# EAGLE board MAIN_CNTRL_v02 (EAGLE 9.7.0), part 1 of 2
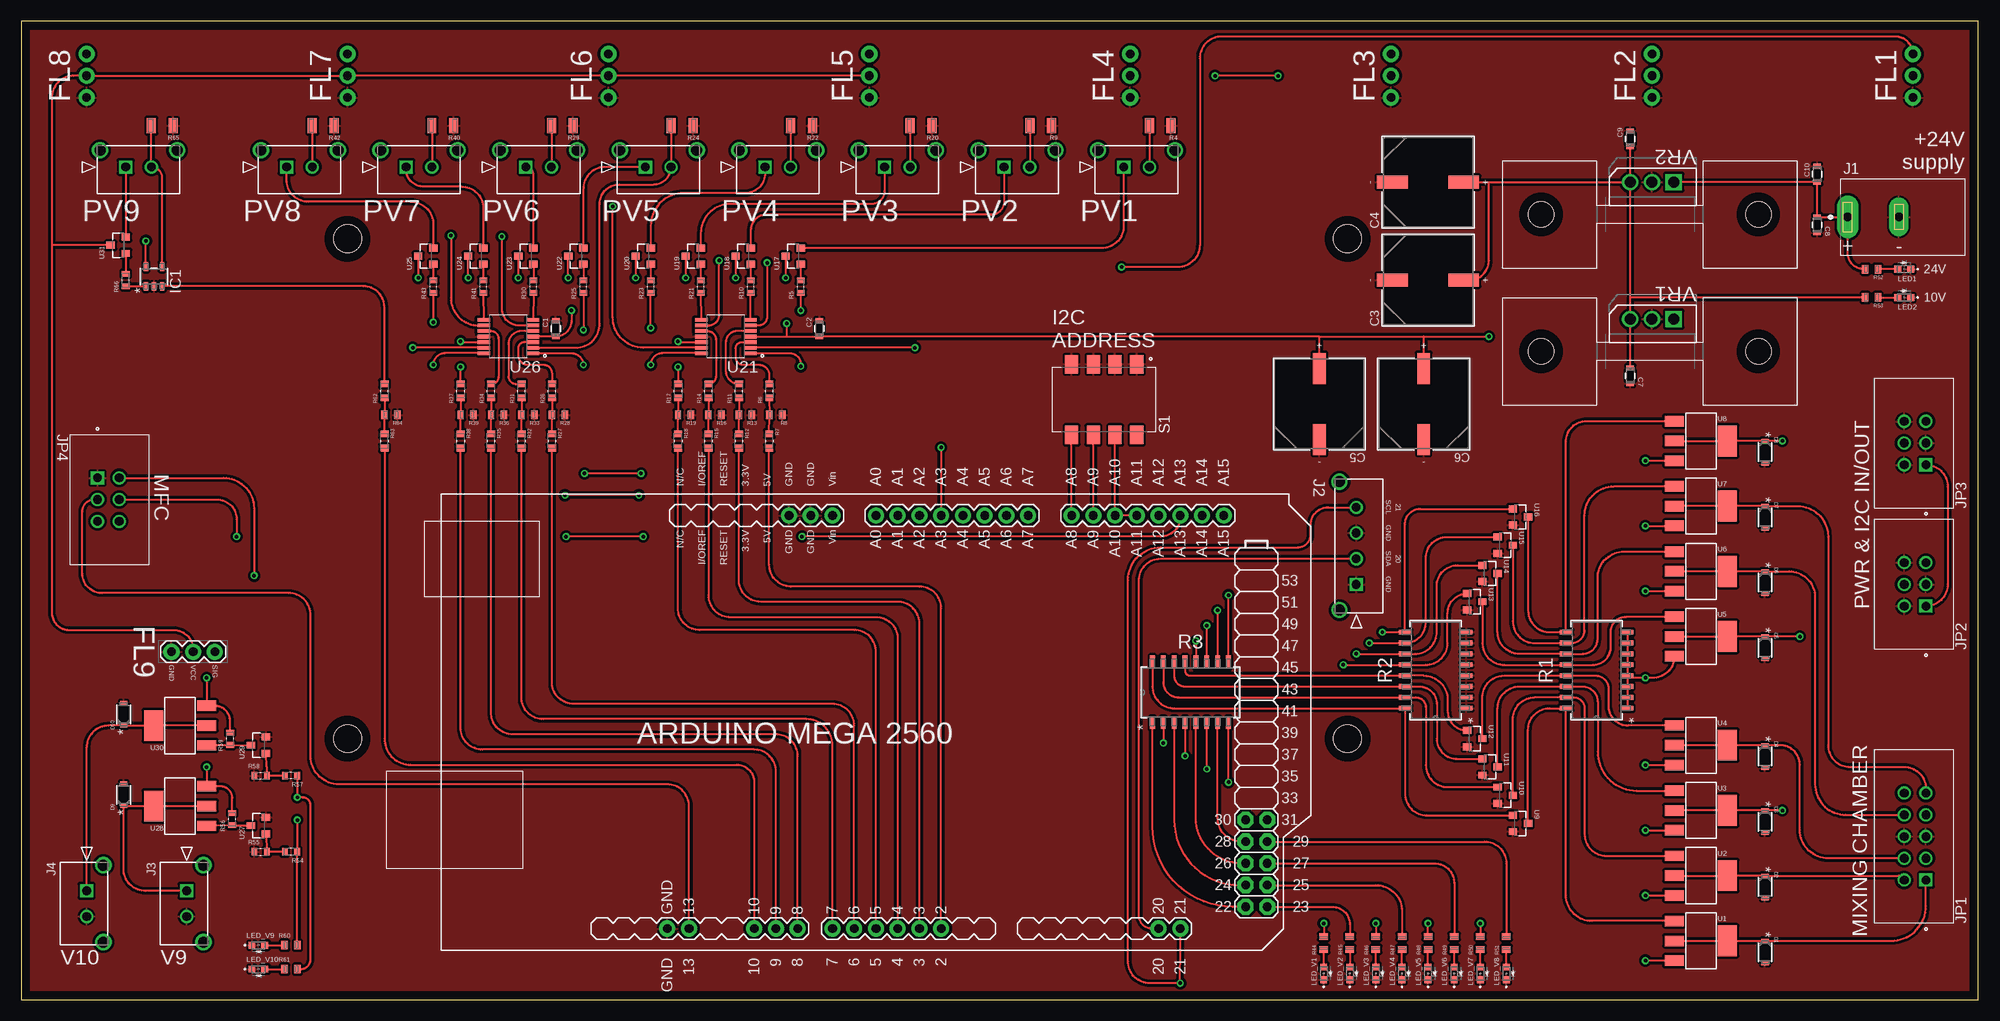
[diagram p0: board, top side]
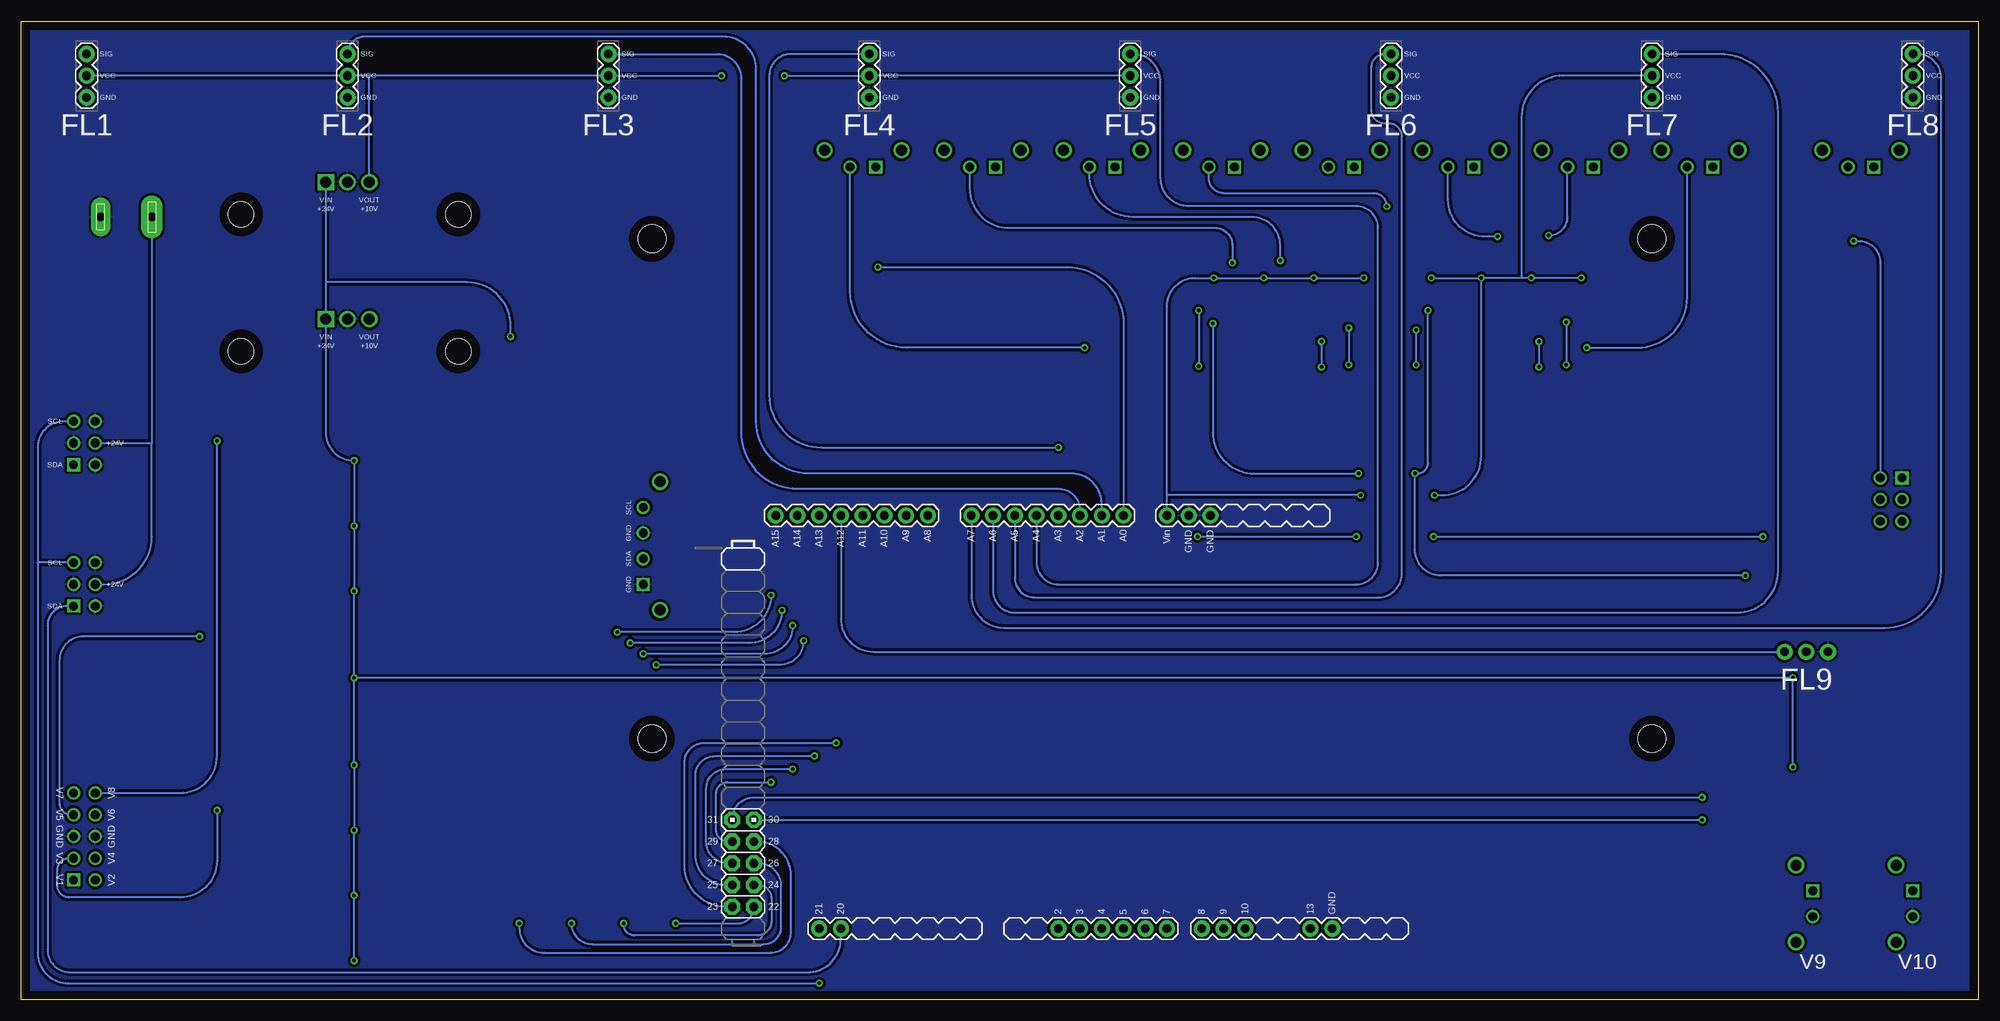
[diagram p1: board, bottom side, seen from below]

Size 228.6 x 114.3 mm. Coordinates in mm from the lower left corner, seen from the top.
Outline: 0,114.3 0,0 228.6,0 228.6,114.3 0,114.3
Copper layers (1*16): Top 0.035mm / dielectric 1.5mm / Bottom 0.035mm
Design rules "default": minimum track width 6mil, minimum drill 0.35mm, track to track 6mil, track to pad 6mil, pad to pad 6mil, via to via 6mil, smd to smd 6mil, copper to edge 40mil, drill to drill 6mil, minimum pad ring 10mil, minimum via ring 8mil, stop-mask expansion 4mil, vias tented up to drill 0mil, thermal gap 10mil
Net classes: 0 default: width 0.203 mm, drill 0.406 mm, clearance 0.203 mm; 1 power: width 0.61 mm, drill 0.406 mm, clearance 0.203 mm; 2 gnd: width 0.305 mm, drill 0.406 mm, clearance 0.203 mm; 3 power usb: width 0.508 mm, drill 0.406 mm, clearance 0.203 mm
Holes 3.28 mm at 154.94,88.9 154.94,30.48 38.1,30.48 38.1,88.9

## Footprints (pad centres in the part's own frame; a part is rotated, then mirrored left to right if it is on the bottom)
CAP_1608_TDK = smd 0.559 x 0.889: 1 -0.927,0; 2 0.927,0
CAP_J-V_10X10P5_RUB = smd 3.607 x 1.499: + 4.153,0; - -4.153,0
DIO_RB160VAM_ROM = smd 0.457 x 0.838: 1 -1.321,0; 2 1.321,0
1X03_FL = drill 1.016 pad 1.88: 1 0,0; 2 2.54,0; 3 5.08,0
V8813X = hole 3: -12.7,0; 12.7,0
SOT23-5L_STM-L = smd 1.016 x 0.508: 1 -1.143,0.95; 2 -1.143,0; 3 -1.143,-0.95; 4 1.143,-0.95; 5 1.143,0.95
CUI_PJ-037AH = drill 1 pad 2.5 long: 1 0,0 | drill 1 pad 2.25 long: 2 6,0
MOLEX_4P_FOOTPRINT = drill 1.02 pad 1.52 square: 1 0,0 | drill 1.02 pad 1.52: 2 -3,0; 3 -6,0; 4 -9,0 | drill 1.27 pad 1.27: M1 3,-1.96; M2 -12,-1.96
MOLEX_2P_FOOTPRINT = drill 1.02 pad 1.52 square: 1 0,0 | drill 1.02 pad 1.52: 2 -3,0 | drill 1.27 pad 1.27: M1 3,-1.96; M2 -6,-1.96
CONN_10P_TE_1761681-3_SE_FOR_V02 = drill 1.02 pad 1.37: GND 5.08,0; GND. 5.08,2.54; V2 0,2.54; V3 2.54,0; V4 2.54,2.54; V5 7.62,0; V6 7.62,2.54; V7 10.16,0; V8 10.16,2.54 | drill 1.02 pad 1.37 square: V1 0,0
CONN_6P_TE_1761681-1 = drill 1.02 pad 1.37 square: 1 0,0 | drill 1.02 pad 1.37: 2 0,2.54; 3 2.54,0; 4 2.54,2.54; 5 5.08,0; 6 5.08,2.54
LED_VISHAY_VLMX13XX = smd 0.8 x 0.8: A 0.75,0; C -0.75,0
MOLEX_2P_PVALVES = drill 1.02 pad 1.52 square: 1 0,0 | drill 1.02 pad 1.52: 2 -3,0 | drill 1.27 pad 1.27: M1 3,-1.96; M2 -6,-1.96
BO_4816P = smd 1.422 x 0.559: 1 -3.581,4.445; 2 -3.581,3.175; 3 -3.581,1.905; 4 -3.581,0.635; 5 -3.581,-0.635; 6 -3.581,-1.905; 7 -3.581,-3.175; 8 -3.581,-4.445; 9 3.581,-4.445; 10 3.581,-3.175; 11 3.581,-1.905; 12 3.581,-0.635; 13 3.581,0.635; 14 3.581,1.905; 15 3.581,3.175; 16 3.581,4.445
CRCW1206_E3_REFLOW = smd 1.05 x 1.8: 1 -1.275,0; 2 1.275,0
RES_ERJPA3F1001V = smd 0.65 x 0.9: 1 -0.725,0; 2 0.725,0
RESC1608X55N = smd 0.79 x 0.93: 1 -0.82,0; 2 0.82,0
RCS0603_REFLOW = smd 0.75 x 1: 1 -0.75,0; 2 0.75,0
SW_1-1825059-7 = smd 2.16 x 1.52: 1 -4.13,3.81; 2 -4.13,1.27; 3 -4.13,-1.27; 4 -4.13,-3.81; 5 4.13,-3.81; 6 4.13,-1.27; 7 4.13,1.27; 8 4.13,3.81
SOT223 = smd 1.219 x 2.235: 1 -2.311,-3.099; 2 0,-3.099; 3 2.311,-3.099 | smd 3.6 x 2.2: 4 0,3.099
SOT23 = smd 0.802 x 0.972: 1 -0.95,-0.885; 2 0.95,-0.885; 3 0,0.885
SOP65P640X120-14N = smd 1.57 x 0.41: 1 -2.87,1.95; 2 -2.87,1.3; 3 -2.87,0.65; 4 -2.87,0; 5 -2.87,-0.65; 6 -2.87,-1.3; 7 -2.87,-1.95; 8 2.87,-1.95; 9 2.87,-1.3; 10 2.87,-0.65; 11 2.87,0; 12 2.87,0.65; 13 2.87,1.3; 14 2.87,1.95
L78S10CV = drill 1.27 square: 1 -5.08,0 | drill 1.27: 2 -2.54,0; 3 0,0
ARDUINO_MEGA2560_ST_FLIPPED_CUTS = drill 1.016 pad 1.88: 2 58.42,2.54; 3 55.88,2.54; 4 53.34,2.54; 5 50.8,2.54; 6 48.26,2.54; 7 45.72,2.54; 8 41.656,2.54; 9 39.116,2.54; 10 36.576,2.54; 13 28.956,2.54; 20 83.82,2.54; 21 86.36,2.54; A0 50.8,50.8; A1 53.34,50.8; A2 55.88,50.8; A3 58.42,50.8; A4 60.96,50.8; A5 63.5,50.8; A6 66.04,50.8; A7 68.58,50.8; A8 73.66,50.8; A9 76.2,50.8; A10 78.74,50.8; A11 81.28,50.8; A12 83.82,50.8; A13 86.36,50.8; A14 88.9,50.8; A15 91.44,50.8; GND 26.416,2.54; GND. 43.18,50.8; GND.. 40.64,50.8; VIN 45.72,50.8 | drill 1.016 pad 1.88 octagon: 22 93.98,5.08; 23 96.52,5.08; 24 93.98,7.62; 25 96.52,7.62; 26 93.98,10.16; 27 96.52,10.16; 28 93.98,12.7; 29 96.52,12.7; 30 93.98,15.24; 31 96.52,15.24

## Placement (x,y rotation side)
C1  0.1 uF  [CAP_1608_TDK]  62.42,78.4 90 top
C2  0.1 uF  [CAP_1608_TDK]  93.22,78.4 90 top
C3  100 uF  [CAP_J-V_10X10P5_RUB]  164.34,84.07 0 top
C4  100 uF  [CAP_J-V_10X10P5_RUB]  164.34,95.5 0 top
C5  100 uF  [CAP_J-V_10X10P5_RUB]  151.64,69.6 90 top
C6  100 uF  [CAP_J-V_10X10P5_RUB]  163.83,69.6 90 top
C7  0.1 uF  [CAP_1608_TDK]  187.96,72.9 270 top
C8  0.1 uF  [CAP_1608_TDK]  209.8,90.51 270 top
C9  10000 pF  [CAP_1608_TDK]  187.96,100.58 90 top
C10  10000 pF  [CAP_1608_TDK]  209.8,96.44 90 top
D1  RB168VYM150FHTR  [DIO_RB160VAM_ROM]  203.71,5.54 270 top
D2  RB168VYM150FHTR  [DIO_RB160VAM_ROM]  203.71,13.16 270 top
D3  RB168VYM150FHTR  [DIO_RB160VAM_ROM]  203.71,20.78 270 top
D4  RB168VYM150FHTR  [DIO_RB160VAM_ROM]  203.71,28.4 270 top
D5  RB168VYM150FHTR  [DIO_RB160VAM_ROM]  203.71,41.1 270 top
D6  RB168VYM150FHTR  [DIO_RB160VAM_ROM]  203.71,48.72 270 top
D7  RB168VYM150FHTR  [DIO_RB160VAM_ROM]  203.71,56.34 270 top
D8  RB168VYM150FHTR  [DIO_RB160VAM_ROM]  203.71,63.96 270 top
D9  RB168VYM150FHTR  [DIO_RB160VAM_ROM]  11.94,23.93 90 top
D10  RB168VYM150FHTR  [DIO_RB160VAM_ROM]  11.94,33.32 90 top
FL1  CONN_03_FL  [1X03_FL]  220.98,110.49 270 bottom
FL2  CONN_03_FL  [1X03_FL]  190.5,110.49 270 bottom
FL3  CONN_03_FL  [1X03_FL]  160.02,110.49 270 bottom
FL4  CONN_03_FL  [1X03_FL]  129.54,110.49 270 bottom
FL5  CONN_03_FL  [1X03_FL]  99.06,110.49 270 bottom
FL6  CONN_03_FL  [1X03_FL]  68.58,110.49 270 bottom
FL7  CONN_03_FL  [1X03_FL]  38.1,110.49 270 bottom
FL8  CONN_03_FL  [1X03_FL]  7.62,110.49 270 bottom
FL9  CONN_03_FL  [1X03_FL]  22.61,40.64 180 top
HS1  V8813W  [V8813X]  190.25,91.74 0 top
HS2  V8813W  [V8813X]  190.25,75.74 0 top
IC1  TS321AILTSOT23-5L_STM-L  [SOT23-5L_STM-L]  15.49,84.49 90 top
J1  PJ-037AH  [CUI_PJ-037AH]  213.36,91.44 0 top
J2  MOLEX_436500415  [MOLEX_4P_FOOTPRINT]  155.95,48.51 270 top
J3  MOLEX_436500215  [MOLEX_2P_FOOTPRINT]  19.3,12.7 90 top
J4  MOLEX_436500215  [MOLEX_2P_FOOTPRINT]  7.62,12.7 90 top
JP1  CONN_10P_CUSTOM_N2510-6002RBV02  [CONN_10P_TE_1761681-3_SE_FOR_V02]  222.5,13.97 90 top
JP2  CONN_06_HEADER  [CONN_6P_TE_1761681-1]  222.5,45.97 90 top
JP3  CONN_06_HEADER  [CONN_6P_TE_1761681-1]  222.5,62.48 90 top
JP4  CONN_06_HEADER  [CONN_6P_TE_1761681-1]  8.89,60.96 270 top
LED1  Green LED  [LED_VISHAY_VLMX13XX]  219.96,85.34 180 top
LED2  Green LED  [LED_VISHAY_VLMX13XX]  219.96,82.04 180 top
LED_V1  Blue LED  [LED_VISHAY_VLMX13XX]  152.15,3.05 90 top
LED_V2  Blue LED  [LED_VISHAY_VLMX13XX]  155.19,3.05 90 top
LED_V3  Blue LED  [LED_VISHAY_VLMX13XX]  158.24,3.05 90 top
LED_V4  Blue LED  [LED_VISHAY_VLMX13XX]  161.29,3.05 90 top
LED_V5  Blue LED  [LED_VISHAY_VLMX13XX]  164.34,3.05 90 top
LED_V6  Blue LED  [LED_VISHAY_VLMX13XX]  167.39,3.05 90 top
LED_V7  Blue LED  [LED_VISHAY_VLMX13XX]  170.43,3.05 90 top
LED_V8  Blue LED  [LED_VISHAY_VLMX13XX]  173.48,3.05 90 top
LED_V9  Blue LED  [LED_VISHAY_VLMX13XX]  27.69,6.35 0 top
LED_V10  Blue LED  [LED_VISHAY_VLMX13XX]  27.69,3.56 0 top
PV1  MOLEX_436500215PVALVES  [MOLEX_2P_PVALVES]  128.78,97.28 180 top
PV2  MOLEX_436500215PVALVES  [MOLEX_2P_PVALVES]  114.81,97.28 180 top
PV3  MOLEX_436500215PVALVES  [MOLEX_2P_PVALVES]  100.84,97.28 180 top
PV4  MOLEX_436500215PVALVES  [MOLEX_2P_PVALVES]  86.87,97.28 180 top
PV5  MOLEX_436500215PVALVES  [MOLEX_2P_PVALVES]  72.9,97.28 180 top
PV6  MOLEX_436500215PVALVES  [MOLEX_2P_PVALVES]  58.93,97.28 180 top
PV7  MOLEX_436500215PVALVES  [MOLEX_2P_PVALVES]  44.96,97.28 180 top
PV8  MOLEX_436500215PVALVES  [MOLEX_2P_PVALVES]  30.99,97.28 180 top
PV9  MOLEX_436500215PVALVES  [MOLEX_2P_PVALVES]  12.19,97.28 180 top
R1  10 kΩ  [BO_4816P]  184.02,38.48 180 top
R2  10 kΩ  [BO_4816P]  165.23,38.48 180 top
R3  1 kΩ  [BO_4816P]  136.58,35.89 90 top
R4  2.2 Ω  [CRCW1206_E3_REFLOW]  133.05,102.11 180 top
R5  1 kΩ  [RES_ERJPA3F1001V]  91.06,83.31 90 top
R6  100 kΩ  [RESC1608X55N]  87.38,71.12 90 top
R7  2.2 kΩ  [RESC1608X55N]  87.38,65.28 270 top
R8  120 Ω  [RCS0603_REFLOW]  88.14,68.33 180 top
R9  2.2 Ω  [CRCW1206_E3_REFLOW]  119.08,102.11 180 top
R10  1 kΩ  [RES_ERJPA3F1001V]  85.21,83.31 90 top
R11  100 kΩ  [RESC1608X55N]  83.82,71.12 90 top
R12  2.2 kΩ  [RESC1608X55N]  83.82,65.28 270 top
R13  120 Ω  [RCS0603_REFLOW]  84.58,68.33 180 top
R14  100 kΩ  [RESC1608X55N]  80.26,71.12 90 top
R15  2.2 kΩ  [RESC1608X55N]  80.26,65.28 270 top
R16  120 Ω  [RCS0603_REFLOW]  81.03,68.33 180 top
R17  100 kΩ  [RESC1608X55N]  76.71,71.12 90 top
R18  2.2 kΩ  [RESC1608X55N]  76.71,65.28 270 top
R19  120 Ω  [RCS0603_REFLOW]  77.47,68.33 180 top
R20  2.2 Ω  [CRCW1206_E3_REFLOW]  105.11,102.11 180 top
R21  1 kΩ  [RES_ERJPA3F1001V]  79.37,83.31 90 top
R22  2.2 Ω  [CRCW1206_E3_REFLOW]  91.14,102.11 180 top
R23  1 kΩ  [RES_ERJPA3F1001V]  73.53,83.31 90 top
R24  2.2 Ω  [CRCW1206_E3_REFLOW]  77.17,102.11 180 top
R25  1 kΩ  [RES_ERJPA3F1001V]  65.66,83.31 90 top
R26  100 kΩ  [RESC1608X55N]  61.98,71.12 90 top
R27  2.2 kΩ  [RESC1608X55N]  61.98,65.28 270 top
R28  120 Ω  [RCS0603_REFLOW]  62.74,68.33 180 top
R29  2.2 Ω  [CRCW1206_E3_REFLOW]  63.2,102.11 180 top
R30  1 kΩ  [RES_ERJPA3F1001V]  59.81,83.31 90 top
R31  100 kΩ  [RESC1608X55N]  58.42,71.12 90 top
R32  2.2 kΩ  [RESC1608X55N]  58.42,65.28 270 top
R33  120 Ω  [RCS0603_REFLOW]  59.18,68.33 180 top
R34  100 kΩ  [RESC1608X55N]  54.86,71.12 90 top
R35  2.2 kΩ  [RESC1608X55N]  54.86,65.28 270 top
R36  120 Ω  [RCS0603_REFLOW]  55.63,68.33 180 top
R37  100 kΩ  [RESC1608X55N]  51.31,71.12 90 top
R38  2.2 kΩ  [RESC1608X55N]  51.31,65.28 270 top
R39  120 Ω  [RCS0603_REFLOW]  52.07,68.33 180 top
R40  2.2 Ω  [CRCW1206_E3_REFLOW]  49.23,102.11 180 top
R41  1 kΩ  [RES_ERJPA3F1001V]  53.97,83.31 90 top
R42  2.2 Ω  [CRCW1206_E3_REFLOW]  35.26,102.11 180 top
R43  1 kΩ  [RES_ERJPA3F1001V]  48.13,83.31 90 top
R44  120 Ω  [RCS0603_REFLOW]  152.15,6.6 90 top
R45  120 Ω  [RCS0603_REFLOW]  155.19,6.6 90 top
R46  120 Ω  [RCS0603_REFLOW]  158.24,6.6 90 top
R47  120 Ω  [RCS0603_REFLOW]  161.29,6.6 90 top
R48  120 Ω  [RCS0603_REFLOW]  164.34,6.6 90 top
R49  120 Ω  [RCS0603_REFLOW]  167.39,6.6 90 top
R50  120 Ω  [RCS0603_REFLOW]  170.43,6.6 90 top
R51  120 Ω  [RCS0603_REFLOW]  173.48,6.6 90 top
R52  1.2 kΩ  [RCS0603_REFLOW]  216.15,85.34 180 top
R53  470 Ω  [RCS0603_REFLOW]  216.15,82.04 180 top
R54  1 kΩ  [RES_ERJPA3F1001V]  31.5,17.27 180 top
R55  10 kΩ  [RES_ERJPA3F1001V]  27.94,17.27 0 top
R56  10 kΩ  [RES_ERJPA3F1001V]  24.64,21.08 90 top
R57  1 kΩ  [RES_ERJPA3F1001V]  31.5,26.16 180 top
R58  10 kΩ  [RES_ERJPA3F1001V]  27.94,26.16 0 top
R59  10 kΩ  [RES_ERJPA3F1001V]  24.38,30.48 90 top
R60  120 Ω  [RCS0603_REFLOW]  31.5,6.35 0 top
R61  120 Ω  [RCS0603_REFLOW]  31.5,3.56 0 top
R62  100 kΩ  [RESC1608X55N]  42.42,71.12 90 top
R63  2.2 kΩ  [RESC1608X55N]  42.42,65.28 270 top
R64  120 Ω  [RCS0603_REFLOW]  43.18,68.33 180 top
R65  2.2 Ω  [CRCW1206_E3_REFLOW]  16.47,102.11 180 top
R66  1 kΩ  [RES_ERJPA3F1001V]  12.19,84.07 90 top
S1  1-1825059-7  [SW_1-1825059-7]  126.49,70.1 270 top
U1  ZXMP7A17SOT223A  [SOT223]  196.22,6.86 270 top
U2  ZXMP7A17SOT223A  [SOT223]  196.22,14.48 270 top
U3  ZXMP7A17SOT223A  [SOT223]  196.22,22.1 270 top
U4  ZXMP7A17SOT223A  [SOT223]  196.22,29.72 270 top
U5  ZXMP7A17SOT223A  [SOT223]  196.22,42.42 270 top
U6  ZXMP7A17SOT223A  [SOT223]  196.22,50.04 270 top
U7  ZXMP7A17SOT223A  [SOT223]  196.22,57.66 270 top
U8  ZXMP7A17SOT223A  [SOT223]  196.22,65.28 270 top
U9  IRLML6244TR  [SOT23]  175.13,20.57 270 top
U10  IRLML6244TR  [SOT23]  173.35,23.88 270 top
U11  IRLML6244TR  [SOT23]  171.58,27.18 270 top
U12  IRLML6244TR  [SOT23]  169.8,30.48 270 top
U13  IRLML6244TR  [SOT23]  169.8,46.48 270 top
U14  IRLML6244TR  [SOT23]  171.58,49.78 270 top
U15  IRLML6244TR  [SOT23]  173.35,53.09 270 top
U16  IRLML6244TR  [SOT23]  175.13,56.39 270 top
U17  IRLML6244TR  [SOT23]  90.17,86.87 90 top
U18  IRLML6244TR  [SOT23]  84.33,86.87 90 top
U19  IRLML6244TR  [SOT23]  78.49,86.87 90 top
U20  IRLML6244TR  [SOT23]  72.64,86.87 90 top
U21  LM324KAPWR  [SOP65P640X120-14N]  82.3,77.47 180 top
U22  IRLML6244TR  [SOT23]  64.77,86.87 90 top
U23  IRLML6244TR  [SOT23]  58.93,86.87 90 top
U24  IRLML6244TR  [SOT23]  53.09,86.87 90 top
U25  IRLML6244TR  [SOT23]  47.24,86.87 90 top
U26  LM324KAPWR  [SOP65P640X120-14N]  56.9,77.47 180 top
U27  IRLML6244TR  [SOT23]  27.69,20.32 90 top
U28  ZXMP7A17SOT223A  [SOT223]  18.54,22.61 90 top
U29  IRLML6244TR  [SOT23]  27.69,29.72 90 top
U30  ZXMP7A17SOT223A  [SOT223]  18.54,32 90 top
U31  IRLML6244TR  [SOT23]  11.31,88.14 90 top
VR1  L78S10CV  [L78S10CV]  187.96,79.5 180 top
VR2  L78S10CV  [L78S10CV]  187.96,95.5 180 top
X1  ARDUINO_MEGA2560_HEADERPINSXX  [ARDUINO_MEGA2560_ST_FLIPPED_CUTS]  49.04,5.75 0 top

## Library data of the parts
C1 = lib_v3; DESCRIPTION_VALUE: CAP CER 0.1UF 50V X7R 0603 EPOXY; DIGI-KEY_PART_NUMBER: 445-9834-1-ND; DIGIKEY_LINK: https://www.digikey.com/en/products/detail/tdk-corporation/CGA3E2X7R1H104M080AD/3933567?s=N4IgTCBcDaIMIHECCBmAomAGgdgEoEYAJfABgBYBZEgDhKQBEQBdAXyA; FOOTPRINT_PACKAGE: 0603 (1608 Metric); FUNCTION: prop valve driver (1-5); MF: TDK Corporation; MF_PART_NUMBER: CGA3E2X7R1H104M080AD
C2 = lib_v3; DESCRIPTION_VALUE: CAP CER 0.1UF 50V X7R 0603 EPOXY; DIGI-KEY_PART_NUMBER: 445-9834-1-ND; DIGIKEY_LINK: https://www.digikey.com/en/products/detail/tdk-corporation/CGA3E2X7R1H104M080AD/3933567?s=N4IgTCBcDaIMIHECCBmAomAGgdgEoEYAJfABgBYBZEgDhKQBEQBdAXyA; FOOTPRINT_PACKAGE: 0603 (1608 Metric); FUNCTION: prop valve driver (5-8); MF: TDK Corporation; MF_PART_NUMBER: CGA3E2X7R1H104M080AD
C3 C4 = lib_v3; COPYRIGHT: Copyright (C) 2021 Ultra Librarian. All rights reserved.; DESCRIPTION_VALUE: CAP ALUM 100UF 20% 50V SMD; DIGI-KEY_PART_NUMBER: 1189-2059-1-ND; DIGIKEY_LINK: https://www.digikey.com/en/products/detail/rubycon/50THV100M10X10-5/3568792?s=N4IgTCBcDaIIxwBwE4C0YAMBWNdUDkAREAXQF8g; FOOTPRINT_PACKAGE: Radial, Can - SMD; FUNCTION: power (10V); MF: Rubycon; MF_PART_NUMBER: 50THV100M10X10.5
C5 C6 = lib_v3; COPYRIGHT: Copyright (C) 2021 Ultra Librarian. All rights reserved.; DESCRIPTION_VALUE: CAP ALUM 100UF 20% 50V SMD; DIGI-KEY_PART_NUMBER: 1189-2059-1-ND; DIGIKEY_LINK: https://www.digikey.com/en/products/detail/rubycon/50THV100M10X10-5/3568792?s=N4IgTCBcDaIIxwBwE4C0YAMBWNdUDkAREAXQF8g; FOOTPRINT_PACKAGE: Radial, Can - SMD; FUNCTION: power (24V); MF: Rubycon; MF_PART_NUMBER: 50THV100M10X10.5
C7 = lib_v3; DESCRIPTION_VALUE: CAP CER 0.1UF 50V X7R 0603 EPOXY; DIGI-KEY_PART_NUMBER: 445-9834-1-ND; DIGIKEY_LINK: https://www.digikey.com/en/products/detail/tdk-corporation/CGA3E2X7R1H104M080AD/3933567?s=N4IgTCBcDaIMIHECCBmAomAGgdgEoEYAJfABgBYBZEgDhKQBEQBdAXyA; FOOTPRINT_PACKAGE: 0603 (1608 Metric); FUNCTION: voltage regulator; MF: TDK Corporation; MF_PART_NUMBER: CGA3E2X7R1H104M080AD
C8 = lib_v3; DESCRIPTION_VALUE: CAP CER 0.1UF 50V X7R 0603 EPOXY; DIGI-KEY_PART_NUMBER: 445-9834-1-ND; DIGIKEY_LINK: https://www.digikey.com/en/products/detail/tdk-corporation/CGA3E2X7R1H104M080AD/3933567?s=N4IgTCBcDaIMIHECCBmAomAGgdgEoEYAJfABgBYBZEgDhKQBEQBdAXyA; FOOTPRINT_PACKAGE: 0603 (1608 Metric); FUNCTION: power (24V); MF: TDK Corporation; MF_PART_NUMBER: CGA3E2X7R1H104M080AD
C9 = lib_v3; 3DPACKAGE_LINK: https://www.snapeda.com/parts/CGA3E2X7R1H103K080AE/TDK/view-part/1770912/?ref=search&t=CGA3E2X7R1H103K080AE; COPYRIGHT: Copyright (C) 2021 Ultra Librarian. All rights reserved.; DESCRIPTION_VALUE: CAP CER 10000PF 50V X7R 0603; DIGI-KEY_PART_NUMBER: 445-15955-1-ND; DIGIKEY_LINK: https://www.digikey.com/en/products/detail/tdk-corporation/CGA3E2X7R1H103K080AE/4490592?s=N4IgTCBcDaIMIHECCBmAomAGgdgEoEYAJfABhQGkSAOEpNEAXQF8g; FOOTPRINT_PACKAGE: 0603 (1608 Metric); FUNCTION: power (10V); MF: TDK; MF_PART_NUMBER: CGA3E2X7R1H103K080AE
C10 = lib_v3; 3DPACKAGE_LINK: https://www.snapeda.com/parts/CGA3E2X7R1H103K080AE/TDK/view-part/1770912/?ref=search&t=CGA3E2X7R1H103K080AE; COPYRIGHT: Copyright (C) 2021 Ultra Librarian. All rights reserved.; DESCRIPTION_VALUE: CAP CER 10000PF 50V X7R 0603; DIGI-KEY_PART_NUMBER: 445-15955-1-ND; DIGIKEY_LINK: https://www.digikey.com/en/products/detail/tdk-corporation/CGA3E2X7R1H103K080AE/4490592?s=N4IgTCBcDaIMIHECCBmAomAGgdgEoEYAJfABhQGkSAOEpNEAXQF8g; FOOTPRINT_PACKAGE: 0603 (1608 Metric); FUNCTION: power (24V); MF: TDK; MF_PART_NUMBER: CGA3E2X7R1H103K080AE
D1-D8 = lib_v3; 3DPACKAGE_LINK: https://app.ultralibrarian.com/details/51EB5428-E6C6-11E9-B85E-0AD2C9526B44/ROHM-Semiconductor/RB168VYM150FHTR?ref=digikey&exports=Eagle&open=exports; COPYRIGHT: Copyright (C) 2018 Accelerated Designs. All rights reserved; DESCRIPTION_VALUE: SCHOTTKY BARRIER DIODE (AEC-Q101; DIGI-KEY_PART_NUMBER: RB168VYM150FHCT-ND; DIGIKEY_LINK: https://www.digikey.com/en/products/detail/rohm-semiconductor/RB168VYM150FHTR/8028502; FOOTPRINT_PACKAGE: 2-SMD, Flat Lead; FUNCTION: isolation valve driver; MF: ROHM Semiconductor; MF_PART_NUMBER: RB168VYM150FHTR; SOURCELIBRARY: Rohm_2019-09-23
D9 = lib_v3; 3DPACKAGE_LINK: https://app.ultralibrarian.com/details/51EB5428-E6C6-11E9-B85E-0AD2C9526B44/ROHM-Semiconductor/RB168VYM150FHTR?ref=digikey&exports=Eagle&open=exports; COPYRIGHT: Copyright (C) 2018 Accelerated Designs. All rights reserved; DESCRIPTION_VALUE: SCHOTTKY BARRIER DIODE (AEC-Q101; DIGI-KEY_PART_NUMBER: RB168VYM150FHCT-ND; DIGIKEY_LINK: https://www.digikey.com/en/products/detail/rohm-semiconductor/RB168VYM150FHTR/8028502; FOOTPRINT_PACKAGE: 2-SMD, Flat Lead; FUNCTION: extra iso valve #1; MF: ROHM Semiconductor; MF_PART_NUMBER: RB168VYM150FHTR; SOURCELIBRARY: Rohm_2019-09-23
D10 = lib_v3; 3DPACKAGE_LINK: https://app.ultralibrarian.com/details/51EB5428-E6C6-11E9-B85E-0AD2C9526B44/ROHM-Semiconductor/RB168VYM150FHTR?ref=digikey&exports=Eagle&open=exports; COPYRIGHT: Copyright (C) 2018 Accelerated Designs. All rights reserved; DESCRIPTION_VALUE: SCHOTTKY BARRIER DIODE (AEC-Q101; DIGI-KEY_PART_NUMBER: RB168VYM150FHCT-ND; DIGIKEY_LINK: https://www.digikey.com/en/products/detail/rohm-semiconductor/RB168VYM150FHTR/8028502; FOOTPRINT_PACKAGE: 2-SMD, Flat Lead; FUNCTION: extra iso valve #2; MF: ROHM Semiconductor; MF_PART_NUMBER: RB168VYM150FHTR; SOURCELIBRARY: Rohm_2019-09-23
FL1-FL9 = lib_v3; 3DPACKAGE_LINK: https://componentsearchengine.com/part-view/PPPC031LFBN-RC/Sullins; 3DPACKAGE_SOURCE: Component Search Engine; DESCRIPTION_VALUE: CONN HDR 3POS 0.1 GOLD PCB; DIGI-KEY_PART_NUMBER: S7036-ND; DIGIKEY_LINK: https://www.digikey.com/en/products/detail/sullins-connector-solutions/PPPC031LFBN-RC/810175; FUNCTION: connector to flow sensor; MF: Sullins Connector Solutions; MF_PART_NUMBER: PPPC031LFBN-RC
HS1 HS2 = lib_v3; 3DPACKAGE_SOURCE: me; DESCRIPTION_VALUE: HEATSINK TO-220/TOP-3/SOT-32; DIGI-KEY_PART_NUMBER: AE10771-ND; DIGIKEY_LINK: https://www.digikey.com/en/products/detail/assmann-wsw-components/V8813W/3511502; MF: Assmann WSW Components; MF_PART_NUMBER: V8813W
IC1 = lib_v3; 3DPACKAGE_SOURCE: Ultra Librarian; COPYRIGHT: Copyright (C) 2022 Ultra Librarian. All rights reserved.; DESCRIPTION_VALUE: IC OPAMP GP 1 CIRCUIT SOT23-5; DIGI-KEY_PART_NUMBER: 497-8093-1-ND; DIGIKEY_LINK: https://www.digikey.com/en/products/detail/stmicroelectronics/TS321AILT/1040162; MF: STMicroelectronics; MF_PART_NUMBER: TS321AILT
J1 = lib_v3; 3DPACKAGE_SOURCE: https://www.cuidevices.com/product/resource/digikey3dmodel/pj-037ah; DESCRIPTION_VALUE: CONN PWR JACK 2X5.5MM SOLDER; DIGI-KEY_PART_NUMBER: CP-037AH-ND; DIGIKEY_LINK: https://www.digikey.com/en/products/detail/cui-devices/PJ-037AH/1644547; FOOTPRINT_SOURCE: https://www.cuidevices.com/product/resource/pcbfootprint/pj-037ah; FUNCTION: power jack for +24V supply; MF: CUI Devices; MF_PART_NUMBER: PJ-037AH
J2 = lib_v3; 3DPACKAGE_LINK: https://www.molex.com/molex/products/part-detail/pcb_headers/0436500415; DESCRIPTION_VALUE: CONN HEADER VERT 4POS 3MM; DIGI-KEY_PART_NUMBER: WM1919-ND; DIGIKEY_LINK: https://www.digikey.com/en/products/detail/molex/0436500415/283463?s=N4IgTCBcDaIOoFkCMBOVBaAcgERAXQF8g; FUNCTION: master I2C pins; MF: Molex; MF_PART_NUMBER: 0436500415
J3 J4 = lib_v3; 3DPACKAGE_LINK: https://www.molex.com/molex/products/part-detail/pcb_headers/0436500215; DESCRIPTION_VALUE: CONN HEADER VERT 2POS 3MM; DIGI-KEY_PART_NUMBER: WM1917-ND; DIGIKEY_LINK: https://www.digikey.com/en/products/detail/molex/0436500215/283461?s=N4IgTCBcDaIOoFkCMBOJB2AtAOQCIgF0BfIA; MF: Molex; MF_PART_NUMBER: 0436500215
JP1 = lib_v3; 3DPACKAGE_LINK: https://www.te.com/usa-en/product-1761681-3.html; DESCRIPTION_VALUE: CONN HEADER VERT 10POS 2.54MM; DIGI-KEY_PART_NUMBER: 1761681-3-ND; DIGIKEY_LINK: https://www.digikey.com/en/products/detail/te-connectivity-amp-connectors/1761681-3/2055463; FUNCTION: connector to isolation valves; MF: TE Connectivity AMP Connectors; MF_PART_NUMBER: 1761681-3; NOTE: unclear if this is the correct item
JP2-JP4 = lib_v3; 3DPACKAGE_LINK: https://www.te.com/usa-en/product-1761681-1.html?te_bu=Cor&te_type=other&te_campaign=ult_glo_3d-cad&elqCampaignId=26141#pdp-docs-features; DESCRIPTION_VALUE: CONN HEADER VERT 6POS 2.54MM; DIGI-KEY_PART_NUMBER: A122759-ND; DIGIKEY_LINK: https://www.digikey.com/en/products/detail/te-connectivity-amp-connectors/1761681-1/2285111; FOOTPRINT_SOURCE: SnapEDA; MF: TE Connectivity AMP Connectors; MF_PART_NUMBER: 1761681-1
LED1 LED2 = lib_v3; DESCRIPTION_VALUE: LED GREEN 0603 SMD; DIGI-KEY_PART_NUMBER: VLMG1300-GS08CT-ND; DIGIKEY_LINK: https://www.digikey.com/en/products/detail/vishay-semiconductor-opto-division/VLMG1300-GS08/2813350; FOOTPRINT_PACKAGE: 0603 (1608 Metric); FUNCTION: power indicator; MF: Vishay Semiconductor Opto Division; MF_PART_NUMBER: VLMG1300-GS08
LED_V1-LED_V8 = lib_v3; DESCRIPTION_VALUE: LED BLUE 0603 SMD; DIGI-KEY_PART_NUMBER: VLMB1300-GS08CT-ND; DIGIKEY_LINK: https://www.digikey.com/en/products/detail/vishay-semiconductor-opto-division/VLMB1300-GS08/3025494; FOOTPRINT_PACKAGE: 0603 (1608 Metric); FUNCTION: isolation valve indicator; MF: Vishay Semiconductor Opto Division; MF_PART_NUMBER: VLMB1300-GS08
LED_V9 = lib_v3; DESCRIPTION_VALUE: LED BLUE 0603 SMD; DIGI-KEY_PART_NUMBER: VLMB1300-GS08CT-ND; DIGIKEY_LINK: https://www.digikey.com/en/products/detail/vishay-semiconductor-opto-division/VLMB1300-GS08/3025494; FOOTPRINT_PACKAGE: 0603 (1608 Metric); FUNCTION: extra iso valve #1; MF: Vishay Semiconductor Opto Division; MF_PART_NUMBER: VLMB1300-GS08
LED_V10 = lib_v3; DESCRIPTION_VALUE: LED BLUE 0603 SMD; DIGI-KEY_PART_NUMBER: VLMB1300-GS08CT-ND; DIGIKEY_LINK: https://www.digikey.com/en/products/detail/vishay-semiconductor-opto-division/VLMB1300-GS08/3025494; FOOTPRINT_PACKAGE: 0603 (1608 Metric); FUNCTION: extra iso valve #2; MF: Vishay Semiconductor Opto Division; MF_PART_NUMBER: VLMB1300-GS08
PV1 = lib_v3
PV2-PV9 = lib_v3; FUNCTION: connector to proportional valves
R1 R2 = lib_v3; 3DPACKAGE_LINK: https://www.snapeda.com/parts/4816P-1-102LF/Bourns/view-part/382435/?ref=search&t=4816P-1-102LF; DESCRIPTION_VALUE: RES ARRAY 8 RES 10K OHM 16SOIC; DIGI-KEY_PART_NUMBER: 4816P-1-103LFCT-ND; DIGIKEY_LINK: https://www.digikey.com/en/products/detail/bourns-inc/4816P-1-103LF/1958036?s=N4IgTCBcDaICwA4CMA2ACgWiVgDAZgBkAxEAXQF8g; FOOTPRINT_PACKAGE: 16-SOIC (0.220", 5.59mm Width); FUNCTION: isolation valve driver; MF: Bourns Electronics; MF_PART_NUMBER: 4816P-1-103LF; SOURCELIBRARY: Bourns_2014-12-31
R3 = lib_v3; 3DPACKAGE_LINK: https://www.snapeda.com/parts/4816P-1-102LF/Bourns/view-part/382435/?ref=search&t=4816P-1-102LF; DESCRIPTION_VALUE: RES ARRAY 8 RES 1K OHM 16SOIC; DIGI-KEY_PART_NUMBER: 4816P-1-102LFCT-ND; DIGIKEY_LINK: https://www.digikey.com/en/products/detail/bourns-inc/4816P-1-102LF/1958035?s=N4IgTCBcDaICwA4CMA2ACgWiVgDGAMgGIgC6AvkA; FOOTPRINT_PACKAGE: 16-SOIC (0.220", 5.59mm Width); FUNCTION: isolation valve driver; MF: Bourns Electronics; MF_PART_NUMBER: 4816P-1-102LF; SOURCELIBRARY: Bourns_2014-12-31
R4 R9 R20 R22 R24 R29 R40 R42 R65 = lib_v3; 3DPACKAGE_SOURCE: made from datasheet; DESCRIPTION_VALUE: RES SMD 2.2 OHM 1% 1/4W 1206; DIGI-KEY_PART_NUMBER: 541-2.20FFCT-ND; DIGIKEY_LINK: https://www.digikey.com/en/products/detail/vishay-dale/CRCW12062R20FKEA/1961801?s=N4IgTCBcDaIKwBYCMBaMA6MAGAYjgwgCooByAIiALoC%2BQA; FOOTPRINT_PACKAGE: 1206 (3216 Metric); FUNCTION: prop valve driver; MF: Vishay Dale; MF_PART_NUMBER: CRCW12062R20FKEA; PACKAGE: 3116 Vishay
R5 R10 R21 R23 R25 R30 R41 R43 R66 = lib_v3; 3DPACKAGE_LINK: https://www.snapeda.com/parts/CRCW12062R20FKEA/Vishay%20Dale/view-part/6768481/?ref=search&t=CRCW12062R20FKEA; DESCRIPTION_VALUE: RES SMD 1K OHM 1% 1/4W 0603; DIGI-KEY_PART_NUMBER: P1.0KBYCT-ND; DIGIKEY_LINK: https://www.digikey.com/en/products/detail/panasonic-electronic-components/ERJ-PA3F1001V/5035848?s=N4IgTCBcDaIAoEYB0AGA0gIQJoGEAqAtAHIAiIAugL5A; FOOTPRINT_PACKAGE: 0603 (1608 Metric); FUNCTION: prop valve driver; MF: Panasonic; MF_PART_NUMBER: ERJPA3F1001V; PACKAGE: 1608-2 Panasonic
R6 R11 R14 R17 R26 R31 R34 R37 R62 = lib_v3; 3DPACKAGE_LINK: https://www.snapeda.com/parts/SR0603FR-7T100KL/Yageo/view-part/3876194/?ref=search&t=SR0603FR-7T100KL; DESCRIPTION_VALUE: RES 100K OHM 1% 1/4W 0603; DIGI-KEY_PART_NUMBER: YAG5821CT-ND; DIGIKEY_LINK: https://www.digikey.com/en/products/detail/yageo/SR0603FR-7T100KL/9373095?s=N4IgTCBcDaIMoCUAMA2JBmAYggtAdgBUBGJJAaQBkQBdAXyA; FOOTPRINT_PACKAGE: 0603 (1608 Metric); FUNCTION: prop valve driver; MF: Yageo; MF_PART_NUMBER: SR0603FR-7T100KL; PACKAGE: 1608 Yageo
R7 R12 R15 R18 R27 R32 R35 R38 R63 = lib_v3; 3DPACKAGE_LINK: https://www.snapeda.com/parts/SR0603FR-7T2K2L/Yageo/view-part/3874250/?ref=search&t=SR0603FR-7T2K2L; DESCRIPTION_VALUE: RES 2.2K OHM 1% 1/4W 0603; DIGI-KEY_PART_NUMBER: YAG5834CT-ND; DIGIKEY_LINK: https://www.digikey.com/en/products/detail/yageo/SR0603FR-7T2K2L/9373108?s=N4IgTCBcDaIMoCUAMA2JBmAYggtAdgBUwBpMAGRAF0BfIA; FOOTPRINT_PACKAGE: 0603 (1608 Metric); FUNCTION: prop valve driver; MF: Yageo; MF_PART_NUMBER: SR0603FR-7T2K2L; PACKAGE: 1608 Yageo
R8 R13 R16 R19 R28 R33 R36 R39 R64 = lib_v3; 3DPACKAGE_LINK: https://www.snapeda.com/parts/RCS0603120RFKEA/Vishay/view-part/947981/?ref=search&t=RCS0603120RFKEA; 3DPACKAGE_SOURCE: made from datasheet; DESCRIPTION_VALUE: RES SMD 120 OHM 1% 1/4W 0603; DIGI-KEY_PART_NUMBER: 541-10426-1-ND; DIGIKEY_LINK: https://www.digikey.com/en/products/detail/vishay-dale/RCS0603120RFKEA/5868381?s=N4IgTCBcDaIKwBYCMBaJAGBYBsaUDkAREAXQF8g; FOOTPRINT_PACKAGE: 0603 (1608 Metric); FUNCTION: prop valve driver; MF: Vishay; MF_PART_NUMBER: RCS0603120RFKEA; PACKAGE: 1508 Vishay
R44-R51 = lib_v3; 3DPACKAGE_LINK: https://www.snapeda.com/parts/RCS0603120RFKEA/Vishay/view-part/947981/?ref=search&t=RCS0603120RFKEA; 3DPACKAGE_SOURCE: made from datasheet; DESCRIPTION_VALUE: RES SMD 120 OHM 1% 1/4W 0603; DIGI-KEY_PART_NUMBER: 541-10426-1-ND; DIGIKEY_LINK: https://www.digikey.com/en/products/detail/vishay-dale/RCS0603120RFKEA/5868381?s=N4IgTCBcDaIKwBYCMBaJAGBYBsaUDkAREAXQF8g; FOOTPRINT_PACKAGE: 0603 (1608 Metric); FUNCTION: iso valve LEDs; MF: Vishay; MF_PART_NUMBER: RCS0603120RFKEA; PACKAGE: 1508 Vishay
R52 = lib_v3; DESCRIPTION_VALUE: RES SMD 1.2K OHM 1% 1/4W 0603; DIGI-KEY_PART_NUMBER: 541-10435-1-ND; DIGIKEY_LINK: https://www.digikey.com/en/products/detail/vishay-dale/RCS06031K20FKEA/5868493; FOOTPRINT_PACKAGE: 0603 (1608 Metric); FUNCTION: +24V power LED; MF: Vishay; MF_PART_NUMBER: RCS06031K20FKEA
R53 = lib_v3; 3DPACKAGE_SOURCE: made from datasheet; DESCRIPTION_VALUE: RES SMD 470 OHM 1% 1/4W 0603; DIGI-KEY_PART_NUMBER: 541-10469-1-ND; DIGIKEY_LINK: https://www.digikey.com/en/products/detail/vishay-dale/RCS0603470RFKEA/5868449; FOOTPRINT_PACKAGE: 0603 (1608 Metric); FUNCTION: +10V power LED; MF: Vishay Dale; MF_PART_NUMBER: RCS0603470RFKEA
R54 = lib_v3; 3DPACKAGE_LINK: https://www.snapeda.com/parts/CRCW12062R20FKEA/Vishay%20Dale/view-part/6768481/?ref=search&t=CRCW12062R20FKEA; DESCRIPTION_VALUE: RES SMD 1K OHM 1% 1/4W 0603; DIGI-KEY_PART_NUMBER: P1.0KBYCT-ND; DIGIKEY_LINK: https://www.digikey.com/en/products/detail/panasonic-electronic-components/ERJ-PA3F1001V/5035848?s=N4IgTCBcDaIAoEYB0AGA0gIQJoGEAqAtAHIAiIAugL5A; FOOTPRINT_PACKAGE: 0603 (1608 Metric); FUNCTION: extra iso valve #1; MF: Panasonic; MF_PART_NUMBER: ERJPA3F1001V; PACKAGE: 1608-2 Panasonic
R55 R56 = lib_v3; DESCRIPTION_VALUE: RES SMD 10K OHM 1% 1/3W 0603; DIGI-KEY_PART_NUMBER: P10KBYCT-ND; DIGIKEY_LINK: https://www.digikey.com/en/products/detail/panasonic-electronic-components/ERJ-PA3F1002V/5035849; FOOTPRINT_PACKAGE: 0603 (1608 Metric); FUNCTION: extra iso valve #1; MF: Panasonic; MF_PART_NUMBER: ERJ-PA3F1002V
R57 = lib_v3; 3DPACKAGE_LINK: https://www.snapeda.com/parts/CRCW12062R20FKEA/Vishay%20Dale/view-part/6768481/?ref=search&t=CRCW12062R20FKEA; DESCRIPTION_VALUE: RES SMD 1K OHM 1% 1/4W 0603; DIGI-KEY_PART_NUMBER: P1.0KBYCT-ND; DIGIKEY_LINK: https://www.digikey.com/en/products/detail/panasonic-electronic-components/ERJ-PA3F1001V/5035848?s=N4IgTCBcDaIAoEYB0AGA0gIQJoGEAqAtAHIAiIAugL5A; FOOTPRINT_PACKAGE: 0603 (1608 Metric); FUNCTION: extra iso valve #2; MF: Panasonic; MF_PART_NUMBER: ERJPA3F1001V; PACKAGE: 1608-2 Panasonic
R58 R59 = lib_v3; DESCRIPTION_VALUE: RES SMD 10K OHM 1% 1/3W 0603; DIGI-KEY_PART_NUMBER: P10KBYCT-ND; DIGIKEY_LINK: https://www.digikey.com/en/products/detail/panasonic-electronic-components/ERJ-PA3F1002V/5035849; FOOTPRINT_PACKAGE: 0603 (1608 Metric); FUNCTION: extra iso valve #2; MF: Panasonic; MF_PART_NUMBER: ERJ-PA3F1002V
R60 = lib_v3; 3DPACKAGE_LINK: https://www.snapeda.com/parts/RCS0603120RFKEA/Vishay/view-part/947981/?ref=search&t=RCS0603120RFKEA; 3DPACKAGE_SOURCE: made from datasheet; DESCRIPTION_VALUE: RES SMD 120 OHM 1% 1/4W 0603; DIGI-KEY_PART_NUMBER: 541-10426-1-ND; DIGIKEY_LINK: https://www.digikey.com/en/products/detail/vishay-dale/RCS0603120RFKEA/5868381?s=N4IgTCBcDaIKwBYCMBaJAGBYBsaUDkAREAXQF8g; FOOTPRINT_PACKAGE: 0603 (1608 Metric); FUNCTION: extra iso valve #1; MF: Vishay; MF_PART_NUMBER: RCS0603120RFKEA; PACKAGE: 1508 Vishay
R61 = lib_v3; 3DPACKAGE_LINK: https://www.snapeda.com/parts/RCS0603120RFKEA/Vishay/view-part/947981/?ref=search&t=RCS0603120RFKEA; 3DPACKAGE_SOURCE: made from datasheet; DESCRIPTION_VALUE: RES SMD 120 OHM 1% 1/4W 0603; DIGI-KEY_PART_NUMBER: 541-10426-1-ND; DIGIKEY_LINK: https://www.digikey.com/en/products/detail/vishay-dale/RCS0603120RFKEA/5868381?s=N4IgTCBcDaIKwBYCMBaJAGBYBsaUDkAREAXQF8g; FOOTPRINT_PACKAGE: 0603 (1608 Metric); FUNCTION: extra iso valve #2; MF: Vishay; MF_PART_NUMBER: RCS0603120RFKEA; PACKAGE: 1508 Vishay
S1 = lib_v3; 3DPACKAGE_LINK: https://www.te.com/usa-en/product-1-1825059-7.html; DESCRIPTION_VALUE: SWITCH SLIDE DIP SPST 25MA 24V; DIGI-KEY_PART_NUMBER: 1-1825059-7-ND; DIGIKEY_LINK: https://www.digikey.com/en/products/detail/te-connectivity-alcoswitch-switches/1-1825059-7/1202121?s=N4IgTCBcDaIIwFo4A4wFYAMaCcCDsCAcgCIgC6AvkA; FUNCTION: I2C address select; MF: TE Connectivity; MF_PART_NUMBER: 1-1825059-7; PACKAGE: SMD-6 Omron Electronics
U1-U8 = lib_v3; 3DPACKAGE_LINK: https://app.ultralibrarian.com/details/2CBFA7CB-10A1-11E9-AB3A-0A3560A4CCCC/Diodes-Inc/ZXMP7A17GQTA?ref=digikey&open=exports&exports=ThreeDModel; 3DPACKAGE_SOURCE: Ultra Librarian; DESCRIPTION_VALUE: MOSFET P-CH 70V 2.6A SOT223; DIGI-KEY_PART_NUMBER: ZXMP7A17GQTADICT-ND; DIGIKEY_LINK: https://www.digikey.com/en/products/detail/diodes-incorporated/ZXMP7A17GQTA/4747698; FOOTPRINT_PACKAGE: SOT223; FUNCTION: isolation valve driver; MF: Diodes Incorporated; MF_PART_NUMBER: ZXMP7A17GQTA; NOTE: unclear if this is the one John meant
U9-U16 = lib_v3; 3DPACKAGE_LINK: https://app.ultralibrarian.com/details/A1C9E1FE-7D1F-11EA-8C00-0AD2C9526B44/Infineon/IRLML6244TRPBF?ref=digikey&open=exports&exports=ThreeDModel; 3DPACKAGE_SOURCE: Ultra Librarian; DESCRIPTION_VALUE: MOSFET N-CH 20V 6.3A SOT23; DIGI-KEY_PART_NUMBER: IRLML6244TRPBFCT-ND; DIGIKEY_LINK: https://www.digikey.com/en/products/detail/infineon-technologies/IRLML6244TRPBF/2393871?s=N4IgTCBcDaIJICUAyBZJA2MAWLAVBIAugL5A; FOOTPRINT_PACKAGE: Micro3 (SOT-23); FOOTPRINT_SOURCE: confirmed footprint & pin mapping 11/2/2022; FUNCTION: isolation valve driver; MF: Infineon Technologies; MF_PART_NUMBER: IRLML6244TRPBF
U17-U20 U22-U25 U31 = lib_v3; 3DPACKAGE_LINK: https://app.ultralibrarian.com/details/A1C9E1FE-7D1F-11EA-8C00-0AD2C9526B44/Infineon/IRLML6244TRPBF?ref=digikey&open=exports&exports=ThreeDModel; 3DPACKAGE_SOURCE: Ultra Librarian; DESCRIPTION_VALUE: MOSFET N-CH 20V 6.3A SOT23; DIGI-KEY_PART_NUMBER: IRLML6244TRPBFCT-ND; DIGIKEY_LINK: https://www.digikey.com/en/products/detail/infineon-technologies/IRLML6244TRPBF/2393871?s=N4IgTCBcDaIJICUAyBZJA2MAWLAVBIAugL5A; FOOTPRINT_PACKAGE: Micro3 (SOT-23); FOOTPRINT_SOURCE: confirmed footprint & pin mapping 11/2/2022; FUNCTION: prop valve driver; MF: Infineon Technologies; MF_PART_NUMBER: IRLML6244TRPBF
U21 U26 = lib_v3; 3DPACKAGE_LINK: https://www.snapeda.com/parts/LM324KAPWR/Texas%20Instruments/view-part/?ref=texas_in&t=LM324KAPWR&con_ref=None; DESCRIPTION_VALUE: IC OPAMP GP 4 CIRCUIT 14TSSOP; DIGI-KEY_PART_NUMBER: 296-18449-1-ND; DIGIKEY_LINK: https://www.digikey.com/en/products/detail/texas-instruments/LM324KAPWR/809732?s=N4IgTCBcDa4JwDYC0BGAHAFg3VSByAIiALoC%2BQA; FOOTPRINT_PACKAGE: 14-TSSOP (0.173", 4.40mm Width); FUNCTION: prop valve driver; MF: Texas Instruments; MF_PART_NUMBER: LM324KAPWR; PACKAGE: TSSOP-14 Texas Instruments
U27 = lib_v3; 3DPACKAGE_LINK: https://app.ultralibrarian.com/details/A1C9E1FE-7D1F-11EA-8C00-0AD2C9526B44/Infineon/IRLML6244TRPBF?ref=digikey&open=exports&exports=ThreeDModel; 3DPACKAGE_SOURCE: Ultra Librarian; DESCRIPTION_VALUE: MOSFET N-CH 20V 6.3A SOT23; DIGI-KEY_PART_NUMBER: IRLML6244TRPBFCT-ND; DIGIKEY_LINK: https://www.digikey.com/en/products/detail/infineon-technologies/IRLML6244TRPBF/2393871?s=N4IgTCBcDaIJICUAyBZJA2MAWLAVBIAugL5A; FOOTPRINT_PACKAGE: Micro3 (SOT-23); FOOTPRINT_SOURCE: confirmed footprint & pin mapping 11/2/2022; FUNCTION: extra iso valve #1; MF: Infineon Technologies; MF_PART_NUMBER: IRLML6244TRPBF
U28 = lib_v3; 3DPACKAGE_LINK: https://app.ultralibrarian.com/details/2CBFA7CB-10A1-11E9-AB3A-0A3560A4CCCC/Diodes-Inc/ZXMP7A17GQTA?ref=digikey&open=exports&exports=ThreeDModel; 3DPACKAGE_SOURCE: Ultra Librarian; DESCRIPTION_VALUE: MOSFET P-CH 70V 2.6A SOT223; DIGI-KEY_PART_NUMBER: ZXMP7A17GQTADICT-ND; DIGIKEY_LINK: https://www.digikey.com/en/products/detail/diodes-incorporated/ZXMP7A17GQTA/4747698; FOOTPRINT_PACKAGE: SOT223; FUNCTION: extra iso valve #1; MF: Diodes Incorporated; MF_PART_NUMBER: ZXMP7A17GQTA
U29 = lib_v3; 3DPACKAGE_LINK: https://app.ultralibrarian.com/details/A1C9E1FE-7D1F-11EA-8C00-0AD2C9526B44/Infineon/IRLML6244TRPBF?ref=digikey&open=exports&exports=ThreeDModel; 3DPACKAGE_SOURCE: Ultra Librarian; DESCRIPTION_VALUE: MOSFET N-CH 20V 6.3A SOT23; DIGI-KEY_PART_NUMBER: IRLML6244TRPBFCT-ND; DIGIKEY_LINK: https://www.digikey.com/en/products/detail/infineon-technologies/IRLML6244TRPBF/2393871?s=N4IgTCBcDaIJICUAyBZJA2MAWLAVBIAugL5A; FOOTPRINT_PACKAGE: Micro3 (SOT-23); FOOTPRINT_SOURCE: confirmed footprint & pin mapping 11/2/2022; FUNCTION: extra iso valve #2; MF: Infineon Technologies; MF_PART_NUMBER: IRLML6244TRPBF
U30 = lib_v3; 3DPACKAGE_LINK: https://app.ultralibrarian.com/details/2CBFA7CB-10A1-11E9-AB3A-0A3560A4CCCC/Diodes-Inc/ZXMP7A17GQTA?ref=digikey&open=exports&exports=ThreeDModel; 3DPACKAGE_SOURCE: Ultra Librarian; DESCRIPTION_VALUE: MOSFET P-CH 70V 2.6A SOT223; DIGI-KEY_PART_NUMBER: ZXMP7A17GQTADICT-ND; DIGIKEY_LINK: https://www.digikey.com/en/products/detail/diodes-incorporated/ZXMP7A17GQTA/4747698; FOOTPRINT_PACKAGE: SOT223; FUNCTION: extra iso valve #2; MF: Diodes Incorporated; MF_PART_NUMBER: ZXMP7A17GQTA
VR1 VR2 = lib_v3; DESCRIPTION_VALUE: IC REG LINEAR 10V 2A TO220AB; DIGI-KEY_PART_NUMBER: 497-6039-5-ND; DIGIKEY_LINK: https://www.digikey.com/en/products/detail/stmicroelectronics/L78S10CV/1165899; FUNCTION: voltage regulator; MF: STMicroelectronics; MF_PART_NUMBER: L78S10CV
X1 = lib_v3; FUNCTION: Arduino

## Nets
+10V: C3.+ C4.+ C7.1 C9.1 FL1.2 FL2.2 FL3.2 FL4.2 FL5.2 FL6.2 FL7.2 FL8.2 FL9.2 R53.2 U17.3 U18.3 U19.3 U20.3 U22.3 U23.3 U24.3 U25.3 U31.3 VR1.3 VR2.3 X1.VIN
+24V: C1.1 C2.1 C5.+ C6.+ C8.1 C10.1 IC1.5 J1.1 JP2.4 JP3.4 JP4.2 R1.1 R1.2 R1.3 R1.4 R1.5 R1.6 R1.7 R1.8 R52.2 R56.2 R59.2 U1.3 U2.3 U3.3 U4.3 U5.3 U6.3 U7.3 U8.3 U21.4 U26.4 U28.3 U30.3 VR1.1 VR2.1
GNDA: C1.2 C2.2 C3.- C4.- C5.- C6.- C7.2 C8.2 C9.2 C10.2 D1.2 D2.2 D3.2 D4.2 D5.2 D6.2 D7.2 D8.2 D9.2 D10.2 FL1.3 FL2.3 FL3.3 FL4.3 FL5.3 FL6.3 FL7.3 FL8.3 FL9.3 IC1.2 J1.2 J2.1 J2.3 J3.2 J4.2 JP1.GND JP1.GND. JP2.2 JP2.3 JP2.6 JP3.2 JP3.3 JP3.6 JP4.1 LED1.C LED2.C LED_V1.C LED_V2.C LED_V3.C LED_V4.C LED_V5.C LED_V6.C LED_V7.C LED_V8.C LED_V9.C LED_V10.C R2.1 R2.2 R2.3 R2.4 R2.5 R2.6 R2.7 R2.8 R4.1 R8.1 R9.1 R13.1 R16.1 R19.1 R20.1 R22.1 R24.1 R28.1 R29.1 R33.1 R36.1 R39.1 R40.1 R42.1 R55.1 R58.1 R64.1 R65.1 S1.1 S1.2 S1.3 S1.4 U9.2 U10.2 U11.2 U12.2 U13.2 U14.2 U15.2 U16.2 U21.11 U26.11 U27.2 U29.2 VR1.2 VR2.2 X1.GND X1.GND. X1.GND..
MC_V1: D1.1 JP1.V1 U1.2 U1.4
MC_V2: D2.1 JP1.V2 U2.2 U2.4
MC_V3: D3.1 JP1.V3 U3.2 U3.4
MC_V4: D4.1 JP1.V4 U4.2 U4.4
MC_V5: D5.1 JP1.V5 U5.2 U5.4
MC_V6: D6.1 JP1.V6 U6.2 U6.4
MC_V7: D7.1 JP1.V7 U7.2 U7.4
MC_V8: D8.1 JP1.V8 U8.2 U8.4
MFC_AIN: JP4.3 X1.13
N$1-1: R1.16 U1.1 U9.3
N$1-2: R2.16 R3.16 U9.1
N$2-1: R1.15 U2.1 U10.3
N$2-2: R2.15 R3.15 U10.1
N$3-1: R1.14 U3.1 U11.3
N$3-2: R2.14 R3.14 U11.1
N$4-1: R1.13 U4.1 U12.3
N$4-2: R2.13 R3.13 U12.1
N$5-1: R1.12 U5.1 U13.3
N$5-2: R2.12 R3.12 U13.1
N$6-1: R1.11 U6.1 U14.3
N$6-2: R2.11 R3.11 U14.1
N$7-1: R1.10 U7.1 U15.3
N$7-2: R2.10 R3.10 U15.1
N$8-1: R1.9 U8.1 U16.3
N$8-2: R2.9 R3.9 U16.1
N$9-1: R56.1 U27.3 U28.1
N$9-2: R54.2 R55.2 U27.1
N$10-1: R59.1 U29.3 U30.1
N$10-2: R57.2 R58.2 U29.1
N$11: R6.1 R7.1 R8.2
N$12: R6.2 U21.3
N$13: R5.2 U17.1
N$18_: LED1.A R52.1
N$19_: LED2.A R53.1
N$21: R11.1 R12.1 R13.2
N$22: R11.2 U21.5
N$23: R10.2 U18.1
N$31: R14.1 R15.1 R16.2
N$32: R14.2 U21.10
N$33: R21.2 U19.1
N$41: R17.1 R18.1 R19.2
N$42: R17.2 U21.12
N$43: R23.2 U20.1
N$51: R26.1 R27.1 R28.2
N$52: R26.2 U26.3
N$53: R25.2 U22.1
N$61: R31.1 R32.1 R33.2
N$62: R31.2 U26.5
N$63: R30.2 U23.1
N$71: R34.1 R35.1 R36.2
N$72: R34.2 U26.10
N$73: R41.2 U24.1
N$81: R37.1 R38.1 R39.2
N$82: R37.2 U26.12
N$83: R43.2 U25.1
N$91: R62.1 R63.1 R64.2
N$92: IC1.3 R62.2
N$94: R66.2 U31.1
N$A0: FL1.1 X1.A0
N$A1: FL2.1 X1.A1
N$A2: FL3.1 X1.A2
N$A3: FL4.1 X1.A3
N$A4: FL5.1 X1.A4
N$A5: FL6.1 X1.A5
N$A6: FL7.1 X1.A6
N$A7: FL8.1 X1.A7
N$A8: S1.5 X1.A8
N$A9: S1.6 X1.A9
N$A10: S1.7 X1.A10 X1.A11
N$A12: FL9.1 X1.A12
N$A13: JP4.4 X1.A13
N$LED1: LED_V1.A R44.1
N$LED2: LED_V2.A R45.1
N$LED3: LED_V3.A R46.1
N$LED4: LED_V4.A R47.1
N$LED5: LED_V5.A R48.1
N$LED6: LED_V6.A R49.1
N$LED7: LED_V7.A R50.1
N$LED8: LED_V8.A R51.1
N$LED9: LED_V9.A R60.1
N$LED10: LED_V10.A R61.1
N$PV1_1: PV1.1 U17.2
N$PV1_2: PV1.2 R4.2 U21.2
N$PV1_OUT: R5.1 U21.1
N$PV2_1: PV2.1 U18.2
N$PV2_2: PV2.2 R9.2 U21.6
N$PV2_OUT: R10.1 U21.7
N$PV3_1: PV3.1 U19.2
N$PV3_2: PV3.2 R20.2 U21.9
N$PV3_OUT: R21.1 U21.8
N$PV4_1: PV4.1 U20.2
N$PV4_2: PV4.2 R22.2 U21.13
N$PV4_OUT: R23.1 U21.14
N$PV5_1: PV5.1 U22.2
N$PV5_2: PV5.2 R24.2 U26.2
N$PV5_OUT: R25.1 U26.1
N$PV6_1: PV6.1 U23.2
N$PV6_2: PV6.2 R29.2 U26.6
N$PV6_OUT: R30.1 U26.7
N$PV7_1: PV7.1 U24.2
N$PV7_2: PV7.2 R40.2 U26.9
N$PV7_OUT: R41.1 U26.8
N$PV8_1: PV8.1 U25.2
N$PV8_2: PV8.2 R42.2 U26.13
N$PV8_OUT: R43.1 U26.14
N$PV9_1: PV9.1 U31.2
N$PV9_2: IC1.4 PV9.2 R65.2
N$PV9_OUT: IC1.1 R66.1
N$V9: D9.1 J3.1 U28.2 U28.4
N$V10: D10.1 J4.1 U30.2 U30.4
P1: R7.2 X1.2
P2: R12.2 X1.3
P3: R15.2 X1.4
P4: R18.2 X1.5
P5: R27.2 X1.6
P6: R32.2 X1.7
P7: R35.2 X1.8
P8: R38.2 X1.9
P9: R63.2 X1.10
SCL: J2.4 JP2.5 JP3.5 X1.21
SDA: J2.2 JP2.1 JP3.1 X1.20
V1: R3.1 R44.2 X1.22
V2: R3.2 R45.2 X1.23
V3: R3.3 R46.2 X1.24
V4: R3.4 R47.2 X1.25
V5: R3.5 R48.2 X1.26
V6: R3.6 R49.2 X1.27
V7: R3.7 R50.2 X1.28
V8: R3.8 R51.2 X1.29
V9: R54.1 R60.2 X1.30
V10: R57.1 R61.2 X1.31